# Altium PCB u-byke mainboard.PcbDoc
Units mm, origin at the board's own origin, x right, y up, seen from the top; angles counter-clockwise.
Board outline 152.4 x 101.6 mm, 2 copper layers (Top Layer, Bottom Layer); 33 components, 56 nets, 163 pads, 28 vias.
Unrouted connection lines stored in the file: 88.
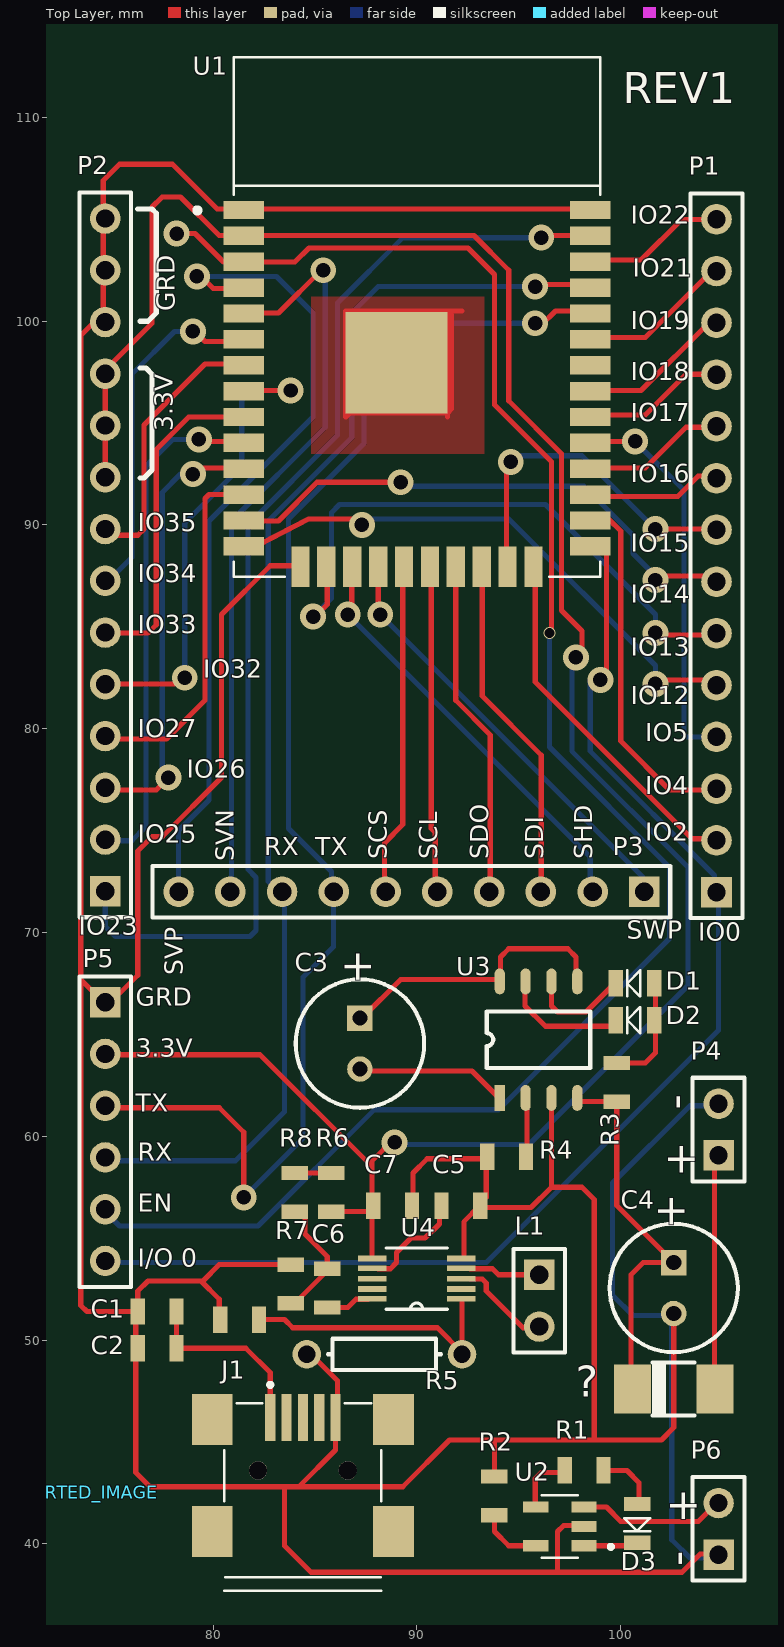
[diagram p0: Top Layer view]
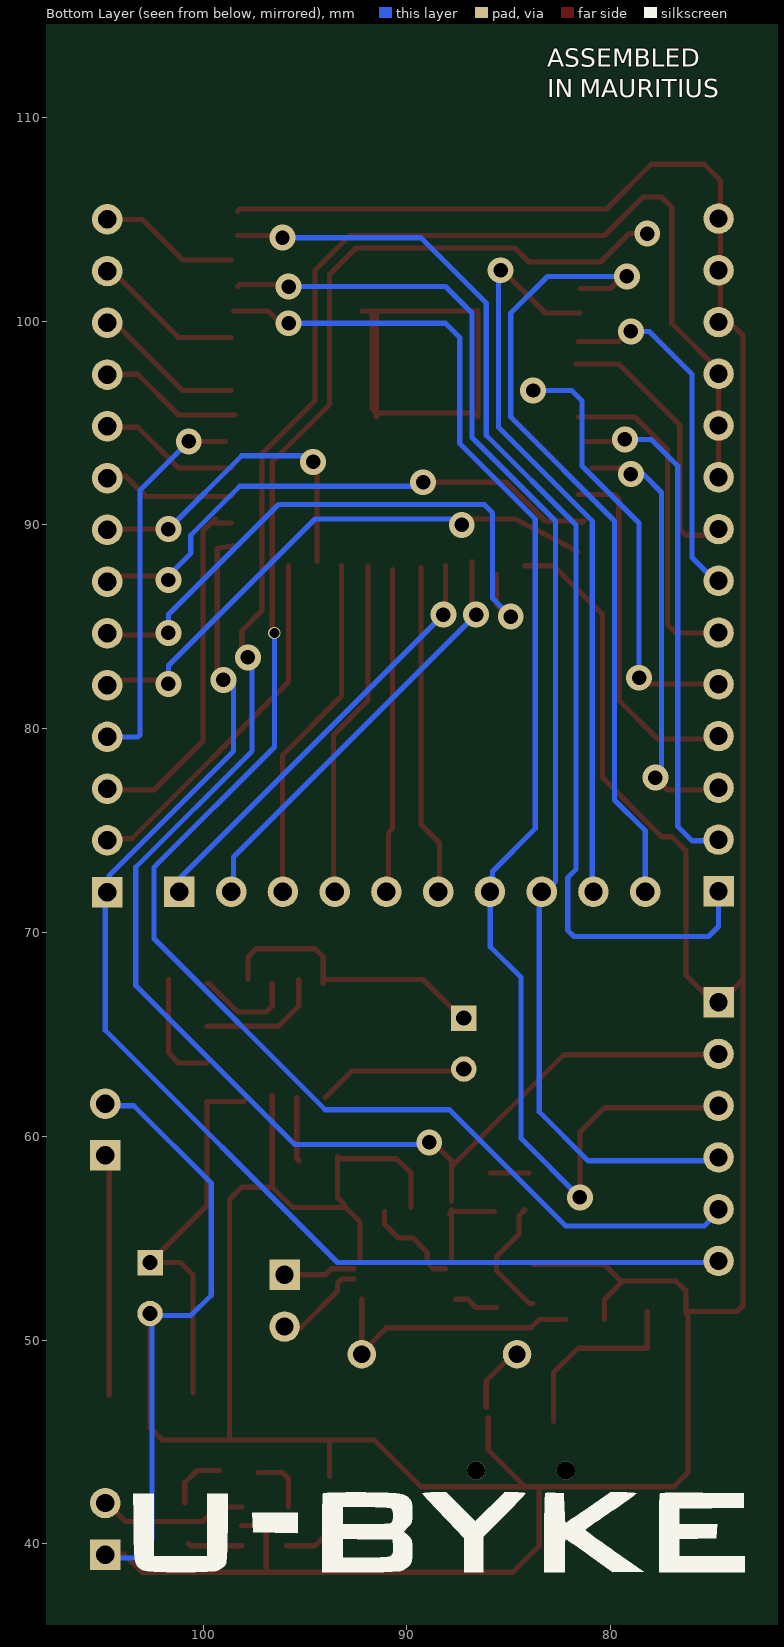
[diagram p1: Bottom Layer view, seen from below]

## Layer stack, top to bottom
Top Solder: solder mask 0.0102, Solder Resist, Dk 3.5
Top Layer: signal copper 0.0356
Dielectric 1: dielectric 0.32, FR-4, Dk 4.8
Bottom Layer: signal copper 0.0356
Bottom Solder: solder mask 0.0102, Solder Resist, Dk 3.5

## Board outline
25.4,25.4 177.8,25.4 177.8,127 25.4,127

## Design rules (kind name [scope] priority, off if disabled: settings)
Clearance [All] p1 off: gap=0.254 ignorepadtopadclearanceinfootprint=FALSE except(0: Arc-Hole Track-Hole SMDPad-Hole THPad-Hole Via-Hole Fill-Hole Poly-Hole Region-Hole Text-Hole)
PolygonConnect [All] p1: connectstyle=Relief reliefconductorwidth=0.254 reliefentries=4 polygonreliefangle="90 Angle" airgapwidth=0.254
RoutingVias [All] p1: holewidth=0.711 width=1.27 viastyle="Through Hole" minholewidth=0.711 minwidth=1.27 maxholewidth=0.711 maxwidth=1.27
ShortCircuit [All] p1: allowed=TRUE
SolderMaskExpansion [All] p1: expansion=0.102
UnpouredPolygon [All] p1: allowunpoured=TRUE allowshelved=TRUE
Width [All] p1: maxlimit=0.254 minlimit=0.254 preferedwidth=0.254
28 further rules are at their usual default settings.

## Classes and differential pairs
component class "UBYKE mainboard schematic": ? C1 C2 C3 C4 C5 C6 C7 D1 D2 D3 J1 P1 P2 P3 P4 P5 P6 R1 R2 R3 R4 R5 R6 R7 R8 U1 U2 U3 U4

## Components (designator, comment, footprint, x,y, rotation, side; value= is the part's Value field where it differs from the comment)
? "SS14" *DO-214AC_SS14(Primary) 102.6,47.6 r0 top
C1 "Cap" C0805 77.25,51.4 r0 top value=10uF
C2 "Cap" C0805 77.25,49.6 r0 top value=100nF
C3 "Cap Pol2" C 87.2,64.55 r270 top value=4.7uF
C4 "Cap Pol2" C 102.6,52.55 r270 top value=22uF
C5 "Cap" C0805 92.15,56.6 r0 top value=10uF
C6 "Cap" C0805 85.6,52.55 r270 top value=1.5nF
C7 "Cap" C0805 88.8,56.6 r180 top value=22uF
D1 "LED2" D0805 100.7,67.5 r180 top
D2 "LED2" D0805 100.7,65.7 r180 top
D3 "LED2" D0805 100.8,41 r270 top
IMPORTED_IMAGE "Comment" IMPORTED_IMAGE 73.416,42.521 r0 top
J1 "1734035-1" *TE_1734035-1 84.4,46.1 r0 top
L1 "Inductor" BAT-2 96,51.93 r270 top value=10uH
P1 "Header 14" HDR1X14 104.7,71.98 r90 top
P2 "Header 14" HDR1X14 74.7,72.02 r90 top
P3 "Header 10" HDR1X10 101.16,72 r180 top
P4 "Header 2" HDR1X2 104.8,59.06 r90 top
P5 "Header 6" HDR1X6 74.7,66.58 r270 top
P6 "Header 2" HDR1X2 104.8,39.46 r90 top
R1 "" R0805 98.2,43.6 r0 top value=220
R2 "" R0805 93.8,42.35 r270 top value=2K
R3 "Res2" R0805 99.8,62.65 r90 top value=330
R4 "Res2" R0805 94.4,59 r0 top value=3.6K
R5 "Res2" AXIAL-0.3 88.4,49.3 r0 top value=60.4K
R6 "Res2" R0805 85.8,57.25 r270 top value=340K
R7 "Res2" R0805 83.8,52.75 r270 top value=200K
R8 "Res2" R0805 84,57.25 r270 top value=15K
U1 "ESP32-WROOM-32D" *MODULE_ESP32-WROOM-32D 90,100.2 r0 top
U2 "LTC4054LES5-4.2#TRPBF" *SOT95P280X100-5N 97.015,40.85 r180 top
U3 "CN3083" "SOP8 - duplicate" 94.06,61.884 r90 top
U4 "LTC3440EMSPBF" *SOP50P490X110-10N 89.984,53.009 r180 top
? "Comment" R0805 81.3,51 r0 top

## Footprints (in the part's own frame and the unit in brackets; to place one, negate y for a bottom-side part, rotate by r counter-clockwise, add the part's x,y. Pads: shape width x height; smd on the part's side, far side on the other; paste and mask are expansions set on the pad)
*DO-214AC_SS14(Primary) [mm]
  rect 1.8x2.4 smd: A(2.025,0) C(-2.025,0)
  silkscreen extent -1.07,-1.3 1.02,1.3
*MODULE_ESP32-WROOM-32D [mm]
  rect 2x0.9 smd: 1(-8.5,5.26) 2(-8.5,3.99) 3(-8.5,2.72) 4(-8.5,1.45) 5(-8.5,0.18) 6(-8.5,-1.09) 7(-8.5,-2.36) 8(-8.5,-3.63) 9(-8.5,-4.9) 10(-8.5,-6.17) 11(-8.5,-7.44) 12(-8.5,-8.71) 13(-8.5,-9.98) 14(-8.5,-11.25) 25(8.5,-11.25) 26(8.5,-9.98) 27(8.5,-8.71) 28(8.5,-7.44) 29(8.5,-6.17) 30(8.5,-4.9) 31(8.5,-3.63) 32(8.5,-2.36) 33(8.5,-1.09) 34(8.5,0.18) 35(8.5,1.45) 36(8.5,2.72) 37(8.5,3.99) 38(8.5,5.26)
  rect 0.9x2 smd: 15(-5.715,-12.25) 16(-4.445,-12.25) 17(-3.175,-12.25) 18(-1.905,-12.25) 19(-0.635,-12.25) 20(0.635,-12.25) 21(1.905,-12.25) 22(3.175,-12.25) 23(4.445,-12.25) 24(5.715,-12.25)
  rect 5x5 smd: 39(-1,-2.24)
  silkscreen extent -10.88,-12.75 9,12.75
*SOP50P490X110-10N [mil]
  rect 55x11 smd: 1(-86,39) 2(-86,20) 3(-86,0) 4(-86,-20) 5(-86,-39) 6(86,-39) 7(86,-20) 8(86,0) 9(86,20) 10(86,39)
  silkscreen extent -59,-59 59,59
*SOT95P280X100-5N [mm]
  rect 1.24x0.55 smd: 1(-1.185,0.95) 2(-1.185,0) 3(-1.185,-0.95) 4(1.185,-0.95) 5(1.185,0.95)
  silkscreen extent -2.6,-1.54 0.88,1.54
*TE_1734035-1 [mm]
  rect 0.5x2.3 smd: 1(-1.6,0.1) 2(-0.8,0.1) 3(0,0.1) 4(0.8,0.1) 5(1.6,0.1)
  rect 2x2.5 smd: 6(-4.45,0) 7(-4.45,-5.5) 8(4.45,-5.5) 9(4.45,0)
  round 0.9 hole 0.9 unplated: None(-2.2,-2.5) None(2.2,-2.5)
  silkscreen extent -3.85,-8.4 3.85,1.8
AXIAL-0.3 [mm] "Axial Device, Thru-Hole; 2 Leads; 0.3 in Pin Spacing"
  round 1.4 hole 0.85: 1(-3.81,0) 2(3.81,0)
  silkscreen extent -2.77,-0.76 2.77,0.76
BAT-2 [mm] "Battery; 2 Leads"
  rect 1.5x1.5 hole 0.9: 1(-1.27,0)
  round 1.5 hole 0.9: 2(1.27,0)
  silkscreen extent -2.54,-1.27 2.54,1.27
C [mm] "Capacitor, Electrolytic, Radial; Body 6.3 x 6.8 mm (Dia.xH typ); Pin Spacing 2.5 mm (typ)"
  rect 1.25x1.25 hole 0.75: 1(-1.25,0)
  round 1.25 hole 0.75: 2(1.25,0)
  silkscreen extent -3.15,-3.15 3.15,3.15
C0805 [mm] "Radial Cap, Thru-Hole; 2 Leads; 0.3 in Pin Spacing"
  rect 0.7x1.3 smd: 1(-0.95,0) 2(0.95,0)
D0805 [mm] "SMT LED; 2 Flat Leads"
  rect 0.7x1.3 smd: A(-0.95,0) K(0.95,0)
  silkscreen extent -0.25,-0.64 0.38,0.64
HDR1X2 [mm] "Connector; Header; 2 Position"
  rect 1.5x1.5 hole 0.9: 1(0,0)
  round 1.5 hole 0.9: 2(2.54,0)
  silkscreen extent -1.27,-1.27 3.81,1.27
HDR1X6 [mm] "Connector; Header; 6 Position"
  rect 1.5x1.5 hole 0.9: 1(0,0)
  round 1.5 hole 0.9: 2(2.54,0) 3(5.08,0) 4(7.62,0) 5(10.16,0) 6(12.7,0)
  silkscreen extent -1.27,-1.27 13.97,1.27
HDR1X10 [mm] "Connector; Header; 10 Position"
  rect 1.5x1.5 hole 0.9: 1(0,0)
  round 1.5 hole 0.9: 2(2.54,0) 3(5.08,0) 4(7.62,0) 5(10.16,0) 6(12.7,0) 7(15.24,0) 8(17.78,0) 9(20.32,0) 10(22.86,0)
  silkscreen extent -1.27,-1.27 24.13,1.27
HDR1X14 [mm] "Connector; Header; 14 Position"
  rect 1.5x1.5 hole 0.9: 1(0,0)
  round 1.5 hole 0.9: 2(2.54,0) 3(5.08,0) 4(7.62,0) 5(10.16,0) 6(12.7,0) 7(15.24,0) 8(17.78,0) 9(20.32,0) 10(22.86,0) 11(25.4,0) 12(27.94,0) 13(30.48,0) 14(33.02,0)
  silkscreen extent -1.27,-1.27 34.29,1.27
IMPORTED_IMAGE [mm]
R0805 [mm] "Axial Device, Thru-Hole; 2 Leads; 0.4 in Pin Spacing"
  rect 0.7x1.3 smd: 1(-0.95,0) 2(0.95,0)
"SOP8 - duplicate" [mm]
  rect 1.27x0.5 smd: 1(0,0)
  oval 1.27x0.5 smd: 2(0,-1.27) 3(0,-2.54) 4(0,-3.81) 5(5.716,-3.81) 6(5.716,-2.54) 7(5.716,-1.27) 8(5.716,0)
  silkscreen extent 1.47,-4.44 4.25,0.64

## Part data
?: "SS14 Series 500 mV 1 A 40 V Max Reverse Voltage Schottky Rectifier - DO-214AC", Package="DO-214AC-214 ON Semiconductor", Availability=Unavailable, MF="ON Semiconductor", MP=SS14, Price=None, SnapEDA_Link=https://www.snapeda.com/parts/SS14/ON%20Semiconductor/view-part/?ref=snap
C1 C2 C5 C6 C7: "Capacitor", LatestRevisionDate=17-Jul-2002, LatestRevisionNote="Re-released for DXP Platform.", PackageDescription="Radial Cap, Thru-Hole; 2 Leads; 0.3 in Pin Spacing", PackageReference=RAD-0.3, Published=8-Jun-2000, Publisher="Altium Limited"
C3 C4: "Polarized Capacitor (Axial)", LatestRevisionDate=17-Jul-2002, LatestRevisionNote="Re-released for DXP Platform.", PackageDescription="Polarized Capacitor; 2 Leads", PackageReference=POLAR0.8, Published=8-Jun-2000, Publisher="Altium Limited"
D1 D2 D3: "Typical RED, GREEN, YELLOW, AMBER GaAs LED", LatestRevisionDate=17-Jul-2002, LatestRevisionNote="Re-released for DXP Platform.", PackageDescription="SM LED; 2 Flat Leads", PackageReference=3.2X1.6X1.1, PackageVersion=Feb-2002, Published=8-Jun-2000, Publisher="Altium Limited"
J1: "Mini USB,R/A,SMT,B Type,pbFree", Package=None, Availability=Unavailable, Centerline_Pitch=".8 mm[.031 in]", EU_RoHS_Compliance=Compliant, MF="TE Connectivity", MP=1734035-1, Number_of_Positions=5, Price=None, Product_Type=Connector, SnapEDA_Link=https://www.snapeda.com/parts/1734035-1/TE%20Connectivity%20AMP%20Connectors/view-part/?ref=snap, TE_purchase_URL=https://www.te.com/usa-en/product-1734035-1.html?te_bu=Cor&te_type=disp&te_campaign=seda_glo_cor-seda-global-disp-prtnr-fy19-seda-model-bom-cta_sma-317_1&elqCampaignId=32493
P1 P2: "Header, 14-Pin", LatestRevisionDate=17-Jul-2002, LatestRevisionNote="Re-released for DXP Platform.", Publisher="Altium Limited"
P3: "Header, 10-Pin", LatestRevisionDate=17-Jul-2002, LatestRevisionNote="Re-released for DXP Platform.", Publisher="Altium Limited"
P4 P6: "Header, 2-Pin", LatestRevisionDate=17-Jul-2002, LatestRevisionNote="Re-released for DXP Platform.", Publisher="Altium Limited"
P5: "Header, 6-Pin", LatestRevisionDate=17-Jul-2002, LatestRevisionNote="Re-released for DXP Platform.", Publisher="Altium Limited"
R1 R2: library part Res2, "Resistor", LatestRevisionDate=17-Jul-2002, LatestRevisionNote="Re-released for DXP Platform.", PackageDescription="Axial Device, Thru-Hole; 2 Leads; 0.4 in Pin Spacing", PackageReference=AXIAL-0.4, Published=8-Jun-2000, Publisher="Altium Limited"
R3 R4 R5 R6 R7 R8: "Resistor", LatestRevisionDate=17-Jul-2002, LatestRevisionNote="Re-released for DXP Platform.", PackageDescription="Axial Device, Thru-Hole; 2 Leads; 0.4 in Pin Spacing", PackageReference=AXIAL-0.4, Published=8-Jun-2000, Publisher="Altium Limited"
U1: "IC: SoC; GPIO, I2C, I2S, IR, SD, SDIO, SPI, UART; 2.7÷3.6VDC; 20dBm", Package="Module Espressif Systems", Availability=Unavailable, MF="Espressif Systems", MP=ESP32-WROOM-32D, Price=None, SnapEDA_Link=https://www.snapeda.com/parts/ESP32-WROOM-32D/Espressif%20Systems/view-part/?ref=snap
U2: "LTC4054L-4.2 - 150mA Standalone Linear Li-Ion Battery Charger in ThinSOT", Package="SOT-23-5 Linear Technology", Availability=Unavailable, MF="Linear Technology/Analog", MP=LTC4054LES5-4.2#TRPBF, Price=None, SnapEDA_Link=https://www.snapeda.com/parts/LTC4054LES5-4.2%23TRPBF/Analog%20Devices/view-part/?ref=snap
U4: "Con Volt DC-DC Single Output Non-In Volt In Volt Step Up/Step Down 10-Pin MSOP", Package="MSOP-10 Linear Technology", Availability=Unavailable, MF="Linear Technology/Analog", MP=LTC3440EMS#PBF, Price=None, SnapEDA_Link=https://www.snapeda.com/parts/LTC3440EMS%23PBF/Analog%20Devices/view-part/?ref=snap
L1: Code_IEC=1005, Code_JEITA=0402, LatestRevisionDate=29-May-2009, LatestRevisionNote="IPC-7351 Footprint Added.", PackageDescription="Chip Inductor", PackageReference=0402-A, Published=8-Jun-2000, Publisher="Altium Limited"

## Via types
v1: diameter 1.27, hole 0.711, Top Layer to Bottom Layer, 26 vias
v2: diameter 0.6, hole 0.5, Top Layer to Bottom Layer, 1 vias
v3: diameter 1.27, hole 0.711, Top Layer to Bottom Layer, tented top, 1 vias

## Nets (pads, with @x,y where several pads share a name; then routed paths per layer and width w, separated by ;. In a path a pad name is that pad's centre, name@x,y a point inside that pad or via, vN(x,y) a via of type N, cw(c..) or ccw(c..) an arc to the next point about the centre after c; other vN are vias at no path point)
3.3V: C7.2 P2.9 P2.10 P2.11 P5.2 R6.2 U1.2 U4.6 | length 2.4
  Top Layer w0.254: U4.6 C7.2@87.8,56.4
5V: C1.2 C2.2 J1.1 R1.1 U2.4
D+: J1.3
D-: J1.2
EN: P5.5 U1.3
GND: C1.1 C2.1 C4.2 C5.2 C7.1 J1.5 P2.12 P2.13 P2.14 P4.2 P5.1 P6.1 R2.1 R4.1 R5.1 R7.1 U1.1 U1.15 U1.38 U1.39 U2.2 U3.3 U4.5
GPIO0: P1.1 P5.6 U1.25 | length 7.3
  Top Layer w0.254: U1.25@98.5,89 99.3,88.85 99.3,82.4
Net?_A: ?.A P4.1
NetC3_1: C3.1 U3.5 U3.8
NetC3_2: C3.2 U3.1
NetC6_1: C6.1 R8.2
NetC6_2: C6.2 U4.10
NetD1_1: R3.2
NetD1_2: U3.6
NetD2_2: U3.7
NetD3_1: R1.2
NetD3_2: U2.1
NetL1_1: L1.1 U4.4
NetL1_2: L1.2 U4.3
NetP1_2: P1.2 U1.24
NetP1_3: P1.3 U1.26
NetP1_4: P1.4 U1.29
NetP1_5: P1.5 U1.14 | length 3.5
  Top Layer w0.254: U1.14@81.6,88.7 84.7,90.3
NetP1_6: P1.6 U1.16
NetP1_7: P1.7 U1.13
NetP1_8: P1.8 U1.23
NetP1_9: P1.9 U1.27
NetP1_10: P1.10 U1.28
NetP1_11: P1.11 U1.30
NetP1_12: P1.12 U1.31
NetP1_13: P1.13 U1.33
NetP1_14: P1.14 U1.36
NetP2_1: P2.1 U1.37
NetP2_2: P2.2 U1.10
NetP2_3: P2.3 U1.11
NetP2_4: P2.4 U1.12
NetP2_5: P2.5 U1.8
NetP2_6: P2.6 U1.9
NetP2_7: P2.7 U1.6
NetP2_8: P2.8 U1.7
NetP3_1: P3.1 U1.18
NetP3_2: P3.2 U1.17
NetP3_3: P3.3 U1.22
NetP3_4: P3.4 U1.21
NetP3_5: P3.5 U1.20
NetP3_6: P3.6 U1.19
NetP3_9: P3.9 U1.5
NetP3_10: P3.10 U1.4
NetR2_2: R2.2 U2.5
NetR4_2: R4.2 U3.2
NetR5_2: R5.2 U4.1 | length 2.5
  Top Layer w0.254: R5.2@92.21,49.5 U4.1@92.21,52
NetR6_1: R6.1 R7.2 R8.1 U4.9
RX: P3.8 P5.4 U1.35
SV: ?.C C4.1 R3.1 U3.4
TX: P3.7 P5.3 U1.34
VBAT: C5.1 P6.2 U2.3 U4.7 U4.8
pads on no net: ?.1 ?.2 D1.A D1.K D2.A D2.K D3.A D3.K J1.4 J1.6 J1.7 J1.8 J1.9 J1.None U1.32 U4.2
copper on no net: | length 1385.3
  Top Layer w0.254: 73.5,67.8 73.5,51.7 73.8,51.4 76.3,51.4 ; 74.5,84.7 76.8,84.7 77.2,85.1 77.2,93.7 78.8,95.3 81.6,95.3 ; 74.6,66.6 73.5,67.7 73.5,99.3 74.1,99.9 74.7,99.9 ; 74.6,99.9 74.6,105.1 74.6,106.9 75.4,107.7 78,107.7 80.2,105.5 81.5,105.5 ; 74.7,61.4 80.3,61.4 81.5,60.2 v1(81.5,57) ; 74.7,64 82.3,64 87.8,58.5 87.8,56.8 87.8,58.8 v1@88.9,59.9 ; 74.7,77 77.2,77 v1@77.7,77.5 ; 74.7,82.2 78.1,82.2 v1@78.5,82.6 ; 74.7,89.5 76.3,89.5 76.6,89.8 76.6,94.9 79.6,97.9 81.7,97.9 ; 74.7,97.3 74.7,97.6 77,99.9 77,105.6 77.5,106.1 78.4,106.1 80.3,104.2 81.7,104.2 ; 74.7,97.4 74.7,92.3 74.8,92.2 ; 74.8,79.5 77.7,79.5 79.6,81.4 79.6,91.3 79.8,91.5 81.6,91.5 ; 75,66.6 76.3,67.9 76.3,74 77,74.7 77.5,74.7 80.4,77.6 80.4,85.6 82.8,88 84.2,88 ; 76.2,51.4 76.2,43.5 76.9,42.8 84.2,42.8 ; 76.3,51.3 76.3,52.4 76.8,52.9 79.4,52.9 80.3,52 80.3,51 ; v1@78.1,104.3 79.1,104.3 80.5,102.9 81.3,102.9 ; 78.2,51.4 78.2,49.6 81.6,49.6 82.8,48.4 82.8,46 ; v1@78.9,92.5 79.2,92.8 80.9,92.8 ; v1@79,99.6 79.6,99 81.6,99 ; v3@79.3,102.3 80,101.6 81.5,101.6 ; v1@79.4,94.3 79.6,94.1 81.3,94.1 ; 79.5,52.9 80.3,53.7 83.8,53.7 ; 81.3,90.2 83.2,90.2 85.1,92.1 v1(89.2,92.1) ; 81.3,104.2 92.8,104.2 94.5,102.5 94.5,96.1 97.1,93.5 97.1,85.8 98.1,84.8 v1@98.1,83.7 ; 81.4,90.1 81.5,90.2 ; 81.4,102.9 84,102.9 84.7,103.6 92.5,103.6 93.8,102.3 93.8,95.9 96.6,93.1 96.6,84.8 v2(96.5,84.7) ; 81.4,105.5 98.2,105.5 98.3,105.4 ; 81.5,100.4 83.2,100.4 v1@85.3,102.5 ; 81.9,96.6 v1(83.8,96.6) ; 82.2,51 83.5,51 83.9,50.6 91,50.6 92.2,49.4 ; 83.5,42.8 83.5,39.9 84.8,38.6 103,38.6 103.9,39.5 104.8,39.5 ; 83.8,51.8 84,51.8 85.6,53.4 ; 84,58.2 85.9,58.2 ; 84.2,56.4 84.5,56.1 84.5,55.2 85.6,54.1 85.6,53.5 ; 84.6,49.3 84.8,49.3 86.1,48 86.1,46.7 ; 84.7,90.3 v1@87.5,90.3 ; v1(84.9,85.5) 85,85.5 85.6,86.1 85.6,87.6 ; 85.6,51.6 86.6,51.6 87,52 87.6,52 ; 85.7,56.3 87.8,56.3 87.9,56.2 ; 86,46.2 86,44.6 84.2,42.8 ; v1@86.8,86 86.8,88.2 ; 87.2,63.2 92.7,63.2 94,61.9 ; 87.3,65.7 87.3,65.8 89.2,67.7 94.1,67.7 ; 88.1,53.5 88.7,53.5 89,53.8 89,54.3 89.7,55 90.4,55 91.1,55.7 91.1,56.3 ; v1@88.1,85.9 88.1,88 ; 88.4,71.9 88.4,74.4 89.3,75.3 89.3,87.9 ; 89.8,56.5 89.8,58.2 90.5,58.9 93.4,58.9 ; 90.7,87.8 90.7,75.1 90.9,74.9 90.9,71.9 ; 91.5,95.3 91.5,100.4 ; 91.7,100.3 91.7,95.7 91.5,95.5 86.7,95.5 86.5,95.3 86.5,100.5 92.2,100.5 ; 91.9,88 91.9,81.4 93.6,79.7 93.6,72 ; 92.3,54 92.3,55.8 93.1,56.6 ; 92.6,53 93.2,53 93.4,52.8 93.4,52.4 95.2,50.6 96.1,50.6 ; 92.6,53.5 93.7,53.5 94,53.2 96,53.2 ; 93.1,56.5 95.6,56.5 96.6,57.5 ; 93.1,56.7 93.4,57 93.4,59 ; 93.2,88 93.2,81.6 96.1,78.7 96.1,71.9 ; 93.8,41.4 93.8,40.6 94.5,39.9 95.9,39.9 ; 93.8,43.3 93.8,45 ; 94.1,67.5 94.1,68.8 94.5,69.2 97.4,69.2 97.8,68.8 97.8,67.7 ; 94.4,88.2 94.4,92.8 v1@94.8,93.2 ; 95.3,58.8 95.4,58.9 95.4,61.9 ; 95.3,67.7 95.3,66.4 96.3,65.4 99.8,65.4 ; 95.8,41.8 95.8,43.2 96.1,43.5 97.3,43.5 ; 95.8,88 95.8,82.3 103.5,74.6 105,74.6 ; v1@95.8,99.8 96.1,99.8 96.8,100.5 98.5,100.5 ; v1@95.8,101.8 98.2,101.8 98.3,101.7 ; v1@96.1,104.2 98.3,104.2 ; 96.6,62 96.6,57.5 ; 96.6,67.5 96.6,66.4 96.9,66.1 98.3,66.1 99.7,67.5 99.8,67.5 ; 96.9,38.6 96.9,40.6 97.2,40.9 98.1,40.9 ; 97.9,61.8 98,61.7 99.8,61.7 99.8,56.6 102.5,53.9 ; 98.1,39.9 100.6,39.9 100.7,40 ; 98.1,41.8 99.3,41.8 100,41.1 103.8,41.1 104.8,42.1 ; 98.4,95.4 101.2,95.4 103.2,97.4 104.6,97.4 104.8,97.2 ; 98.6,90.1 99.4,90.1 99.4,90.3 100,89.7 100,79.4 102.4,77 104.7,77 ; 98.6,91.4 102.8,91.4 103.8,92.4 104.8,92.4 ; 98.6,92.8 101.2,92.8 103.2,94.8 104.8,94.8 ; 98.6,96.6 101,96.6 104.4,100 ; 98.6,99.2 101.2,99.2 104.4,102.4 ; 98.6,103 101,103 103,105 105,105 ; 98.7,45.1 98.7,56.9 98.1,57.5 96.6,57.5 ; 98.9,94.1 v1(100.7,94.1) ; 99.2,43.6 100.3,43.6 100.9,43 100.9,42 ; 99.8,63.6 101.2,63.6 101.7,64.1 101.7,67.7 ; 100.5,47.4 100.5,53.2 101.1,53.8 102.8,53.8 ; v1@101.6,84.6 104.6,84.6 104.8,84.8 ; v1@101.6,89.8 104.8,89.8 ; v1@101.8,87.5 104.6,87.5 104.9,87.2 ; v1@101.9,82.4 104.4,82.4 104.6,82.2 ; 102.6,51.4 102.6,45.7 102,45.1 91.6,45.1 89.3,42.8 84.2,42.8 ; 104.6,47.3 104.6,58.9
  Bottom Layer w0.254: 74.6,53.8 93.4,53.8 104.8,65.2 104.8,71.9 ; 74.7,56.3 75.4,55.6 82.2,55.6 87.9,61.3 94,61.3 102.4,69.7 ; 74.7,58.8 81.1,58.8 83.5,61.2 83.5,72 ; 74.7,72.2 74.7,70.3 75.2,69.8 81.8,69.8 82.1,70.1 82.1,72.7 81.7,73.1 81.7,90 86.1,94.4 86.1,100.9 89.3,104.1 v1@96,104.1 ; 74.8,87.2 76,88.4 76,97.4 78.1,99.5 v1(79,99.5) ; 74.9,74.5 76,74.5 76.7,75.2 76.7,92.9 78,94.2 v1(79.3,94.2) ; v1@77.5,77.9 77.5,91.6 78.4,92.5 v1(79,92.5) ; 78.3,72 78.3,75 79.8,76.5 ; v1(78.6,82.5) 78.6,90.1 81.4,92.9 81.4,96.1 81.9,96.6 v1@83.6,96.6 ; v3(79.2,102.2) 83.1,102.2 84.9,100.4 84.9,95.3 79.8,90.2 79.8,76.5 ; 79.8,77.1 79.8,76.5 ; 80.9,71.9 80.9,90.2 85.5,94.8 v1@85.5,102.5 ; v1(81.5,57) 84.4,59.9 84.4,67.8 85.9,69.3 85.9,72 ; 83.3,71.9 82.7,72.5 82.7,90.2 86.8,94.3 86.8,100.4 88.1,101.7 v1(95.8,101.7) ; v1(84.9,85.5) 85.8,86.4 85.8,90.6 86.2,91 96.3,91 101.7,85.6 v1@101.7,84.9 ; 85.8,72 85.8,73 83.7,75.1 83.7,90.3 87.4,94 87.4,99.2 88.1,99.9 v1(95.8,99.9) ; v1(86.6,85.6) 98.5,73.7 98.5,72.1 ; v1@87.5,90.3 94.5,90.3 101.7,83.1 v1(101.7,82.2) ; v1(88.2,85.6) 101.1,72.7 101.1,72.2 ; v1@88.9,59.6 95.5,59.6 103.3,67.4 103.3,70 103.3,70.4 103.3,73.2 97.6,78.9 97.6,83.1 v1@97.9,83.4 ; v1@89.3,91.9 98.2,91.9 100.6,89.5 100.6,88.6 v1@101.9,87.3 ; v1@94.6,93.2 94.8,93.4 98.1,93.4 v1@101.6,89.9 ; v2(96.5,84.7) 96.5,79.1 102.4,73.2 102.4,69.7 ; v1@98.5,82.4 98.5,78.9 104.6,72.8 104.6,72 ; v1(100.7,94.1) 103.1,91.7 103.1,80.6 103.1,79.7 103.2,79.6 104.5,79.6 ; 102.4,69.9 102.4,69.7 ; 102.5,51.4 102.5,40.2 103.4,39.3 104.9,39.3 ; 102.6,51.2 100.6,51.2 99.6,52.2 99.6,57.7 103.4,61.5 104.9,61.5 ; 103.3,69.7 103.3,70.6 103.3,69.7
  other v1: 88.9,59.7 77.8,77.6 99,82.4 97.8,83.5 101.7,84.7 101.7,87.3 101.7,89.8 87.3,90 94.6,93.1 85.4,102.5 96.1,104.1 78.2,104.3

## Polygon pours and split planes (outlines as drawn)
no net on Top Layer (solid, pour order 32): 84.8,101.2 93.3,101.2 93.3,93.5 84.8,93.5
no net on Top Layer (hatched Horizontal grid 0.508 track 0.203, pour order 30): 85.2,101.3
no net on Top Layer (hatched Horizontal grid 0.508 track 0.203, pour order 28): 68.6,51.1
no net on Top Layer (solid, pour order 24): 74.1,44
no net on Top Layer (solid, pour order 10): 73,106.4
no net on Top Layer (solid, pour order 4): 73,106.7

## Silkscreen, mask and mechanical layers (free items; w line width, h text height)
Top Overlay:
  lines w0.254: 76.3,105.5 77,105.5 77.2,105.3 77.2,100.4 76.8,100 76.4,100 ; 76.4,92.3 76.6,92.3 77,92.7 77,97.4 76.7,97.7 76.4,97.7
  text "REV1" at 100.1,110.7 h1.52
  text "IO22" at 100.5,104.5 h1.52
  text "IO21" at 100.6,101.9 h1.52
  text "GRD" at 78.4,100.5 h1.52 r90
  text "IO19" at 100.5,99.3 h1.52
  text "IO18" at 100.5,96.8 h1.52
  text "IO17" at 100.5,94.8 h1.52
  text "3.3V" at 78.3,94.6 h1.52 r90
  text "IO16" at 100.5,91.8 h1.52
  text "IO35" at 76.3,89.4 h1.52
  text "IO15" at 100.5,88.4 h1.52
  text "IO34" at 76.3,86.9 h1.52
  text "IO14" at 100.5,85.9 h1.52
  text "IO33" at 76.3,84.4 h1.52
  text "IO13" at 100.5,83.3 h1.52
  text "IO32" at 79.5,82.2 h1.52
  text "IO12" at 100.5,80.9 h1.52
  text "IO27" at 76.3,79.3 h1.52
  text "IO5" at 101.2,79.1 h1.52
  text "IO26" at 78.7,77.3 h1.52
  text "IO4" at 101.2,76.5 h1.52
  text "IO2" at 101.2,74.2 h1.52
  text "IO25" at 76.3,74.1 h1.52
  text "SCS" at 88.8,73.6 h1.52 r90
  text "SCL" at 91.3,73.6 h1.52 r90
  text "SDO" at 93.8,73.6 h1.52 r90
  text "SDI" at 96.5,73.6 h1.52 r90
  text "SHD" at 98.9,73.6 h1.52 r90
  text "SVN" at 81.3,73.5 h1.52 r90
  text "RX" at 82.5,73.5 h1.52
  text "TX" at 85,73.5 h1.52
  text "IO23" at 73.4,69.6 h1.52
  text "SWP" at 100.3,69.4 h1.52
  text "IO0" at 103.8,69.3 h1.52
  text "SVP" at 78.8,67.9 h1.52 r90
  text "GRD" at 76.2,66.1 h1.52
  text "3.3V" at 76.2,63.6 h1.52
  text "-" at 103.4,61.3 h1.52 r90
  text "TX" at 76.2,60.9 h1.52
  text "RX" at 76.3,58.5 h1.52
  text "+" at 102.1,58.2 h1.52
  text "EN" at 76.3,56 h1.52
  text "I/O 0" at 76.3,53.3 h1.52
  text "+" at 102.2,41.2 h1.52
  text "-" at 103.5,38.9 h1.52 r90
Bottom Overlay:
  text "ASSEMBLED" at 83.1,112.2 h1.52
  text "MAURITIUS" at 81.5,110.7 h1.52
  text "IN" at 83.1,110.7 h1.52
Mechanical 1:
  lines w0.254: 73,37.6 73,114 106.4,114 106.4,37.6 73,37.6

## Text inside footprints (layer, text, board x,y; h text height)
C3: Top Overlay "+" at 86.45,69.175 h1.5 r270
C4: Top Overlay "+" at 101.85,57.175 h1.5 r270
U1: Mechanical 4 "ANTENNA" at 84.275,108.601 h1.88; Mechanical 4 "ANTENNA" at 84.275,108.601 h1.88